# EAGLE board CarloopXL-v3.1 (EAGLE 7.5.0)
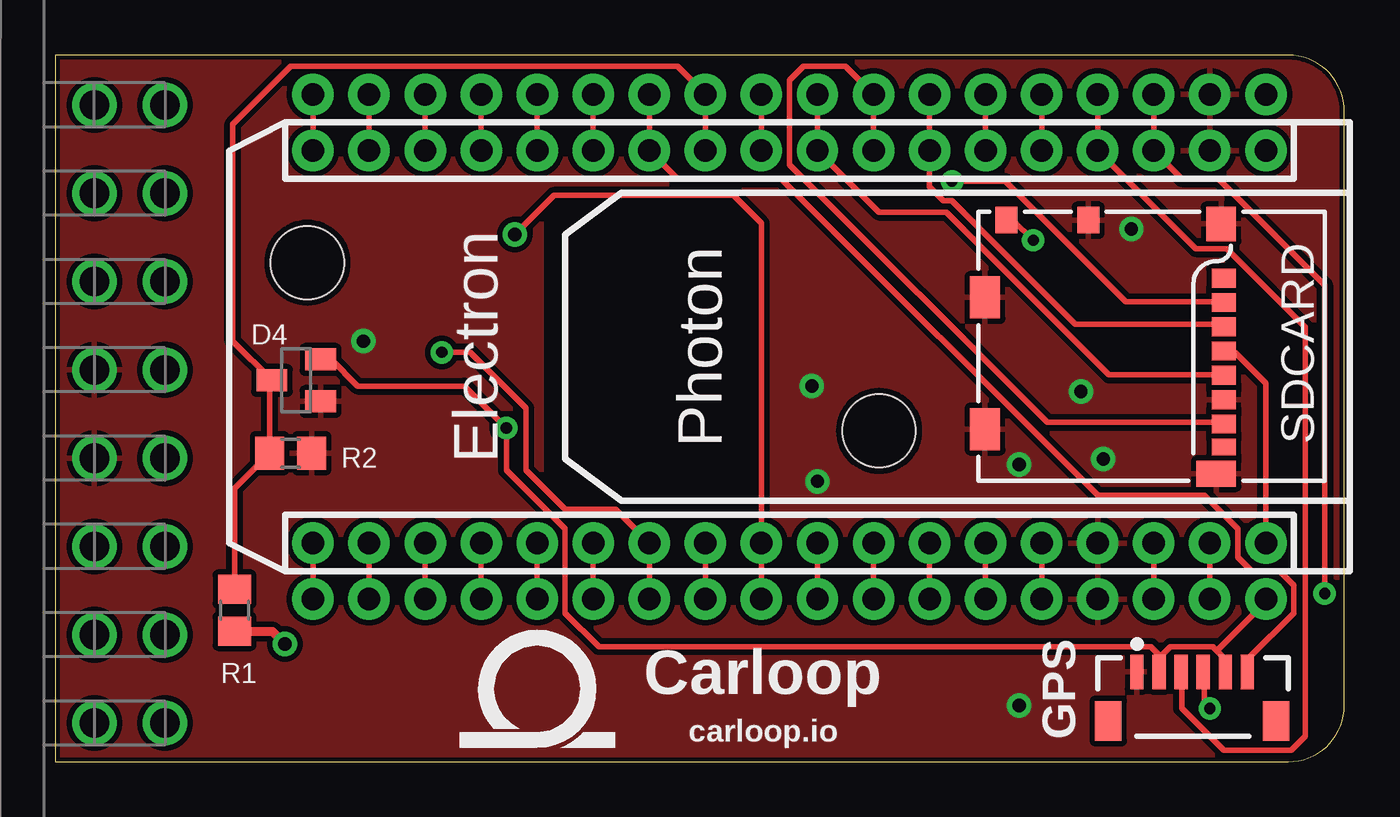
[diagram p0: board, top side]
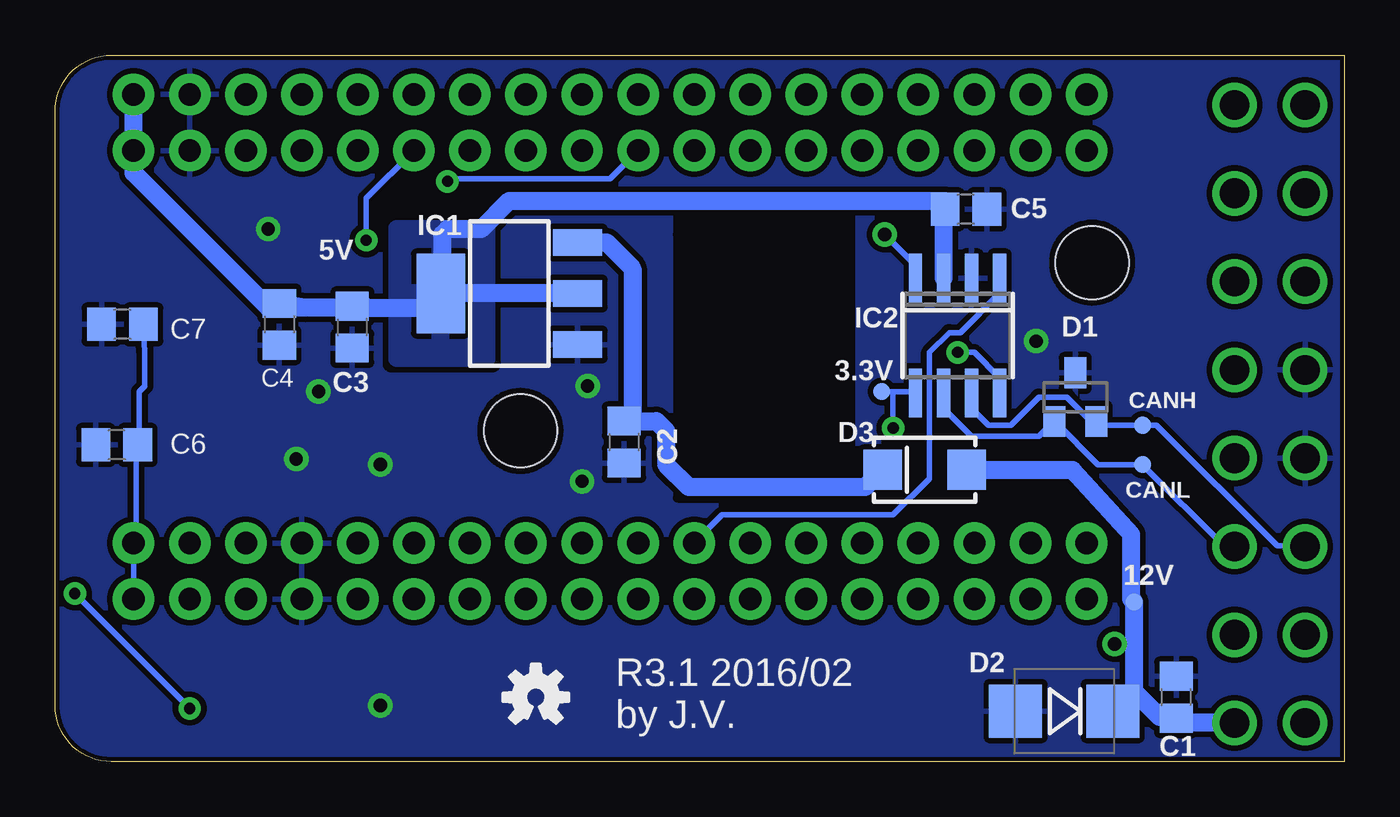
[diagram p1: board, bottom side, seen from below]

Size 58.42 x 32 mm. Coordinates in mm from the lower left corner, seen from the top.
Outline: 0,0 55.88,0 arc90 58.42,2.54 58.42,29.46 arc90 55.88,32 0,32 0,0
Copper layers (1*16): Top 0.035mm / dielectric 1.5mm / Bottom 0.035mm
Design rules "SparkFun *": minimum track width 8mil, minimum drill 20mil, track to track 10mil, track to pad 8mil, pad to pad 10mil, via to via 10mil, smd to smd 10mil, copper to edge 8mil, drill to drill 8mil, minimum pad ring 12mil, minimum via ring 10mil, stop-mask expansion 4mil, vias tented up to drill 45mil, thermal gap 10mil
Net classes: 0 default: width 0.254 mm; 1 power: width 0.813 mm, clearance 0.406 mm
tRestrict: area 22.4,11.9 to 30.2,25.7
bRestrict: area 22.4,11.9 to 30.2,25.7

## Footprints (pad centres in the part's own frame; a part is rotated, then mirrored left to right if it is on the bottom)
C0805 = smd 1.3 x 1.5: 1 -0.95,0; 2 0.95,0
SOT23 = smd 1 x 1.4: 1 -0.95,-1.1; 2 0.95,-1.1; 3 0,1.1
SMB-DIODE = smd 2.4 x 2.4: A 2.2,0; C -2.2,0
SMA-DIODE = smd 1.75 x 1.8: A -1.91,0; C 1.91,0
ELECTRON_EXTERNAL = drill 1.016 pad 1.88: 1 1.27,46.99; 2 1.27,44.45; 3 1.27,41.91; 4 1.27,39.37; 5 1.27,36.83; 6 1.27,34.29; 7 1.27,31.75; 8 1.27,29.21; 9 1.27,26.67; 10 1.27,24.13; 11 1.27,21.59; 12 1.27,19.05; 13 1.27,16.51; 14 1.27,13.97; 15 1.27,11.43; 16 1.27,8.89; 17 1.27,6.35; 18 1.27,3.81; 19 19.05,3.81; 20 19.05,6.35; 21 19.05,8.89; 22 19.05,11.43; 23 19.05,13.97; 24 19.05,16.51; 25 19.05,19.05; 26 19.05,21.59; 27 19.05,24.13; 28 19.05,26.67; 29 19.05,29.21; 30 19.05,31.75; 31 19.05,34.29; 32 19.05,36.83; 33 19.05,39.37; 34 19.05,41.91; 35 19.05,44.45; 36 19.05,46.99; @1 -1.27,46.99; @2 -1.27,44.45; @3 -1.27,41.91; @4 -1.27,39.37; @5 -1.27,36.83; @6 -1.27,34.29; @7 -1.27,31.75; @8 -1.27,29.21; @9 -1.27,26.67; @10 -1.27,24.13; @11 -1.27,21.59; @12 -1.27,19.05; @13 -1.27,16.51; @14 -1.27,13.97; @15 -1.27,11.43; @16 -1.27,8.89; @17 -1.27,6.35; @18 -1.27,3.81; @19 21.59,3.81; @20 21.59,6.35; @21 21.59,8.89; @22 21.59,11.43; @23 21.59,13.97; @24 21.59,16.51; @25 21.59,19.05; @26 21.59,21.59; @27 21.59,24.13; @28 21.59,26.67; @29 21.59,29.21; @30 21.59,31.75; @31 21.59,34.29; @32 21.59,36.83; @33 21.59,39.37; @34 21.59,41.91; @35 21.59,44.45; @36 21.59,46.99
JST-6-SMD-VERT-1.0MM = smd 0.6 x 1.55: 1 -2.54,1.27; 2 -1.54,1.27; 3 -0.54,1.27; 4 0.46,1.27; 5 1.46,1.27; 6 2.46,1.27 | smd 1.2 x 1.8: P$1 -3.84,-0.955; P$2 3.76,-0.955
SOT223 = smd 1.219 x 2.235: 1 -2.311,-3.099; 2 0,-3.099; 3 2.311,-3.099 | smd 3.6 x 2.2: 4 0,3.099
SO8 = smd 0.6 x 2.2: 1 -1.905,-2.6; 2 -0.635,-2.6; 3 0.635,-2.6; 4 1.905,-2.6; 5 1.905,2.6; 6 0.635,2.6; 7 -0.635,2.6; 8 -1.905,2.6
OBDII-COMTECH = drill 1.346: 1 -14,0; 2 -10,0; 3 -6,0; 4 -2,0; 5 2,0; 6 6,0; 7 10,0; 8 14,0; 9 -14,3.2; 10 -10,3.2; 11 -6,3.2; 12 -2,3.2; 13 2,3.2; 14 6,3.2; 15 10,3.2; 16 14,3.2
R0805 = smd 1.3 x 1.5: 1 -0.95,0; 2 0.95,0
MICRO-SD-MOLEX-CORRECT = smd 0.85 x 1.1: 1 3.105,0.25; 2 2.005,0.25; 3 0.905,0.25; 4 -0.195,0.25; 5 -1.295,0.25; 6 -2.395,0.25; 7 -3.495,0.25 | smd 0.75 x 1.1: 8 -4.545,0.25 | smd 1.2 x 1: CD1 5.74,6.4; CD2 5.74,10.1 | smd 1.55 x 1.35: G1 5.565,0.375 | smd 1.17 x 1.8: G2 -5.755,0.6 | smd 1.9 x 1.35: G3 -3.735,11.075; G4 2.235,11.075
STAND-OFF = hole 3.302: 0,0
PAD.03X.03 = smd 0.762 x 0.762: P$1 0,0

## Placement (x,y rotation side)
C1  .47u  [C0805]  7.62,2.92 90 bottom
C2  10u  [C0805]  32.64,14.48 270 bottom
C3  22u  [C0805]  44.96,19.68 270 bottom
C4  DNP  [C0805]  48.26,19.81 270 bottom
C5  0.1u  [C0805]  17.14,25.02 180 bottom
C6  0.1u  [C0805]  55.63,14.35 180 bottom
C7  1u  [C0805]  55.37,19.81 180 bottom
D1  PESD1CAN  [SOT23]  12.19,16.51 0 bottom
D2  1SMB16CAT3G  [SMB-DIODE]  12.7,2.29 180 bottom
D3  RS1J  [SMA-DIODE]  19.02,13.23 180 bottom
D4  BAT54S  [SOT23]  10.92,17.27 90 top
ELECTRON  ELECTRON_WITH_EXTERNAL_HEADERS  [ELECTRON_EXTERNAL]  7.87,28.96 270 top
F2  [OSHW-LOGO-S]  36.64,2.92 0 bottom
GPS  JST  [JST-6-SMD-VERT-1.0MM]  51.56,2.79 0 top
IC1  NCP1117CORRECT  [SOT223]  37.85,21.21 90 bottom
IC2  TJA1049  [SO8]  17.53,19.3 180 bottom
J1  OBDII  [OBDII-COMTECH]  1.78,15.75 270 top
R1  62k  [R0805]  8.13,6.86 270 top
R2  10k  [R0805]  10.67,13.97 180 top
SDCARD  USD-SOCKETMOLEX-CORRECT  [MICRO-SD-MOLEX-CORRECT]  53.21,18.8 90 top
STANDOFF1  STAND-OFF  [STAND-OFF]  11.43,22.61 0 top
STANDOFF2  STAND-OFF  [STAND-OFF]  37.34,14.99 0 top
TP1  CANH  [PAD.03X.03]  9.14,15.24 0 bottom
TP2  CANL  [PAD.03X.03]  9.14,13.46 0 bottom
TP3  12V  [PAD.03X.03]  9.53,7.24 0 bottom
TP5  3.3V  [PAD.03X.03]  20.95,16.76 0 bottom
U$1  LOGO  [CARLOOP]  18.03,0.76 0 top
ZDRAW1  [A4L-LOC]  64.71,30.72 0 top  (outside the outline)

## Library data of the parts
C1 = rcl; PARTNO: C0805C474K5RACTU
C2 = rcl; PARTNO: GRM21BR6YA106KE43L
C3 C4 = rcl; PARTNO: GRM219R61A226MEA0D
C5 C6 = rcl; PARTNO: 08055C104KAT2A
C7 = rcl; PARTNO: CC0805KKX7R7BB105
D1 = MuniRent; PARTNO: PESD1CAN-215
D2 = BUG; PARTNO: 1SMB16CAT3G; ROLE: Overvoltage protection
D3 = BUG; PARTNO: RS1J-E3/5AT; ROLE: Reverse protection
D4 = MuniRent; PARTNO: BAT54S-7-F
ELECTRON = MuniRent; PARTNO: PPTC181LFBN-RC
F2 = SparkFun-Aesthetics
GPS = MuniRent; PARTNO: BM06B-SRSS-TB; PROD_ID: CONN-08249
IC1 = MuniRent; PARTNO: NCP1117LPST50T3G
IC2 = MuniRent; PARTNO: TJA1049T-118
J1 = MuniRent; PARTNO: OBD-II
R1 = rcl; PARTNO: ERJ-6ENF6202V
R2 = rcl; PARTNO: ERJ-6ENF1002V
SDCARD = MuniRent; PARTNO: 1040310811
STANDOFF1 STANDOFF2 = SparkFun-Electromechanical; BOM: EXCLUDE
TP1-TP3 TP5 = SparkFun-Passives; BOM: EXCLUDE
U$1 = MuniRent; BOM: EXCLUDE
ZDRAW1 = frames

## Nets
3.3V: C6.1 C7.1 D4.2 ELECTRON.36 ELECTRON.@36 GPS.2 GPS.5 IC2.5 SDCARD.4 TP5.P$1
5V [power]: C3.1 C4.1 C5.2 ELECTRON.1 ELECTRON.@1 IC1.2 IC1.4 IC2.3
+12V [power]: C1.1 D2.C D3.A J1.16 R1.2 TP3.P$1
CANA_EN: ELECTRON.25 ELECTRON.@25 IC2.8
CANA_RX: ELECTRON.27 ELECTRON.@27 IC2.4
CANA_TX: ELECTRON.26 ELECTRON.@26 IC2.1
GND: C1.2 C2.2 C3.2 C4.2 C5.1 C6.2 C7.2 D1.3 D2.A D4.1 ELECTRON.2 ELECTRON.33 ELECTRON.@2 ELECTRON.@33 GPS.1 IC1.1 IC2.2 J1.4 J1.5 R2.1 SDCARD.6 SDCARD.CD1 SDCARD.G1 SDCARD.G2 SDCARD.G3 SDCARD.G4
GPS_EN: ELECTRON.12 ELECTRON.@12 GPS.6
GPS_RX: ELECTRON.3 ELECTRON.@3 GPS.4
GPS_TX: ELECTRON.4 ELECTRON.@4 GPS.3
HSPD_HI: D1.2 IC2.7 J1.6 TP1.P$1
HSPD_LO: D1.1 IC2.6 J1.14 TP2.P$1
N$1: ELECTRON.13 ELECTRON.@13
N$7: ELECTRON.14 ELECTRON.@14
N$10: ELECTRON.35 ELECTRON.@35
N$11: ELECTRON.34 ELECTRON.@34
N$12: ELECTRON.32 ELECTRON.@32
N$13: ELECTRON.31 ELECTRON.@31
N$14: ELECTRON.30 ELECTRON.@30
N$15: ELECTRON.29 ELECTRON.@29
N$16: ELECTRON.28 ELECTRON.@28
N$17: ELECTRON.15 ELECTRON.@15
N$19: ELECTRON.16 ELECTRON.@16
N$20: ELECTRON.17 ELECTRON.@17
N$21: ELECTRON.18 ELECTRON.@18
N$22: ELECTRON.19 ELECTRON.@19
N$23: ELECTRON.20 ELECTRON.@20
N$24: ELECTRON.21 ELECTRON.@21
N$26: ELECTRON.5 ELECTRON.@5
N$27: ELECTRON.23 ELECTRON.@23
N$28: ELECTRON.24 ELECTRON.@24
N$29: ELECTRON.22 ELECTRON.@22
N$31 [power]: C2.1 D3.C IC1.3
SD_CS: ELECTRON.10 ELECTRON.@10 SDCARD.2
SD_DETECT: ELECTRON.6 ELECTRON.@6 SDCARD.CD2
SPI_MISO: ELECTRON.8 ELECTRON.@8 SDCARD.7
SPI_MOSI: ELECTRON.7 ELECTRON.@7 SDCARD.3
SPI_SCK: ELECTRON.9 ELECTRON.@9 SDCARD.5
VBAT: D4.3 ELECTRON.11 ELECTRON.@11 R1.1 R2.2

## Tracks (layer width: path | path; a pad name or v marks a point on that pad's centre or on a via)
3.3V  (via drill 0.51)
  Top 0.254: 52.64,5.02 52.96,4.7 52.96,4.06 GPS.5 | 52.64,5.02 52.45,5.21 50.55,5.21 50.04,4.7 50.04,4.06 GPS.2 50.04,4.83 49.66,5.21 24.64,5.21 23.11,6.73 23.11,10.54 20.45,13.21 v20.45,15.11 18.54,17.02 13.72,17.02 12.51,18.22 | ELECTRON.36 54.86,17.14 53.47,18.54 53.09,18.54 SDCARD.4 | 52.64,5.02 54.86,7.24 ELECTRON.@36
  Top 0.406: D4.2 12.51,18.22
  Bottom 0.254: C7.1 54.36,18.54 54.36,17.02 54.61,16.76 54.61,13.72 C6.1 54.74,13.72 54.74,9.91 ELECTRON.36 ELECTRON.@36 | 20.45,16.76 19.43,16.76 IC2.5 | 20.45,16.76 TP5.P$1 | v20.45,15.11 20.45,16.76
5V
  Bottom 0.813: 46.99,20.57 47.72,20.57 48.75,20.56 54.86,26.67 ELECTRON.1 ELECTRON.@1 | 44.32,20.57 46.99,20.57 | IC2.3 18.16,24.95 C5.2 18.09,25.4 37.85,25.4 39.12,24.13 40.64,24.13 40.89,23.88 40.89,21.26 IC1.4 | C4.1 46.99,20.57 | IC1.2 IC1.4 | 40.77,20.57 40.77,21.03 IC1.4 | C3.1 44.38,20.64 44.32,20.57 | 44.32,20.57 41.66,20.57 41.53,20.45 41.4,20.57 IC1.4
  pour Bottom: 38.86,24.13 42.93,24.13 42.93,18.29 38.86,18.29
+12V  (via drill 0.6)
  Top 0.406: R1.2 9.84,5.91 v10.41,5.33
  Bottom 0.406: v10.41,5.33 9.65,5.33 TP3.P$1
  Bottom 0.813: 9.53,3.17 TP3.P$1 9.65,7.37 9.65,10.29 12.32,13.21 17.09,13.21 D3.A | 9.53,3.17 10.41,2.29 D2.C | 9.53,3.17 8.38,2.03 7.62,2.03 C1.1 7.24,1.78 5.08,1.78 J1.16
CANA_EN  (via drill 0.51)
  Top 0.254: v17.53,18.54 18.8,18.54 21.34,16 21.34,13.21 23.11,11.43 25.4,11.43 ELECTRON.25 ELECTRON.@25
  Bottom 0.254: IC2.8 15.62,17.4 16.76,18.54 v17.53,18.54
CANA_RX  (via drill 0.6)
  Top 0.254: ELECTRON.@27 ELECTRON.27 32,24.38 30.73,25.65 22.61,25.65 v20.83,23.88
  Bottom 0.254: v20.83,23.88 19.43,22.48 IC2.4
CANA_TX
  Top 0.254: ELECTRON.26 ELECTRON.@26
  Bottom 0.254: IC2.1 15.62,21.21 17.4,19.43 17.91,19.43 18.8,18.54 18.8,12.83 20.45,11.18 28.19,11.18 ELECTRON.26
GND  (via drill 0.6)
  Top 0.254: 52.32,27.94 ELECTRON.2 | 47.24,7.62 ELECTRON.@33
  other vias: 46.48,16.76 34.54,12.7 13.97,19.05 43.69,2.54 34.29,17.02 47.5,13.72 43.69,13.46 48.77,24.13
  pour Top (rank 4): 0,0 55.88,0 arc90 58.42,2.54 58.42,29.46 arc90 55.88,32 0,32
  pour Bottom (rank 5): 0,0 55.88,0 arc90 58.42,2.54 58.42,29.46 arc90 55.88,32 0,32
GPS_EN
  Top 0.254: GPS.6 54.1,4.06 54.1,4.7 56.13,6.73 56.13,8 55.5,8.64 54.23,8.64 53.59,9.27 53.59,10.54 52.07,12.06 47.24,12.06 32.89,26.42 28.19,26.42 ELECTRON.12 ELECTRON.@12
GPS_RX  (via drill 0.51)
  Top 0.254: v52.32,2.41 52.07,2.67 52.07,4.06 GPS.4 | v57.53,7.62 57.53,21.59 52.7,26.42 51.05,26.42 ELECTRON.3 ELECTRON.@3
  Bottom 0.254: v57.53,7.62 v52.32,2.41
GPS_TX
  Top 0.254: GPS.3 51.05,4.06 51.05,2.41 52.96,0.51 56.01,0.51 56.64,1.14 56.64,19.68 53.09,23.24 51.69,23.24 ELECTRON.4 ELECTRON.@4
HSPD_HI
  Bottom 0.254: IC2.7 16.89,16 16.13,15.24 15.11,15.24 13.84,16.51 12.57,16.51 11.56,15.49 11.3,15.49 D1.2 11.18,15.37 11.05,15.24 TP1.P$1 8.51,15.24 3.05,9.78 1.78,9.78 J1.6
HSPD_LO
  Bottom 0.254: IC2.6 18.16,16 16.89,14.73 13.84,14.73 13.21,15.37 D1.1 13.08,15.37 11.18,13.46 TP2.P$1 5.46,9.78 5.08,9.78 J1.14
N$1
  Top 0.254: ELECTRON.@13 ELECTRON.13
N$7
  Top 0.254: ELECTRON.@14 ELECTRON.14
N$10
  Top 0.254: ELECTRON.35 ELECTRON.@35
N$11
  Top 0.254: ELECTRON.34 ELECTRON.@34
N$12
  Top 0.254: ELECTRON.32 ELECTRON.@32
N$13
  Top 0.254: ELECTRON.31 ELECTRON.@31
N$14
  Top 0.254: ELECTRON.30 ELECTRON.@30
N$15
  Top 0.254: ELECTRON.29 ELECTRON.@29
N$16
  Top 0.254: ELECTRON.28 ELECTRON.@28
N$17
  Top 0.254: ELECTRON.@15 ELECTRON.15
N$19
  Top 0.254: ELECTRON.@16 ELECTRON.16
N$20
  Top 0.254: ELECTRON.@17 ELECTRON.17
N$21
  Top 0.254: ELECTRON.@18 ELECTRON.18
N$22
  Top 0.254: ELECTRON.19 ELECTRON.@19
N$23
  Top 0.254: ELECTRON.20 ELECTRON.@20
N$24
  Top 0.254: ELECTRON.21 ELECTRON.@21
N$26
  Top 0.254: ELECTRON.@5 ELECTRON.5
N$27
  Top 0.254: ELECTRON.23 ELECTRON.@23
N$28
  Top 0.254: ELECTRON.24 ELECTRON.@24
N$29
  Top 0.254: ELECTRON.22 ELECTRON.@22
N$31
  Bottom 0.813: IC1.3 33.43,23.52 32.26,22.35 32.26,15.81 C2.1 31.18,15.43 30.73,14.99 30.73,13.46 29.72,12.45 21.71,12.45 D3.C
SD_CS  (via drill 0.51)
  Top 0.254: v40.64,26.29 43.05,26.29 48.51,20.83 52.96,20.83 SDCARD.2 | ELECTRON.10 ELECTRON.@10
  Bottom 0.254: v40.64,26.29 40.51,26.42 33.27,26.42 ELECTRON.10
SD_DETECT  (via drill 0.51)
  Top 0.254: ELECTRON.@6 ELECTRON.6 | v44.32,23.62 43.43,24.51 43.18,24.51 SDCARD.CD2
  Bottom 0.254: v44.32,23.62 44.32,25.53 ELECTRON.6
SPI_MISO
  Top 0.254: SDCARD.7 52.96,15.37 44.96,15.37 33.27,27.05 33.27,30.86 33.91,31.5 35.81,31.5 ELECTRON.@8 ELECTRON.8
SPI_MOSI
  Top 0.254: SDCARD.3 52.96,19.81 46.23,19.81 40.64,25.4 40.26,25.4 39.62,26.04 ELECTRON.7 ELECTRON.@7
SPI_SCK
  Top 0.254: SDCARD.5 52.96,17.53 47.75,17.53 40.39,24.89 37.34,24.89 ELECTRON.9 ELECTRON.@9
VBAT
  Top 0.254: ELECTRON.11 ELECTRON.@11 28.19,31.5 10.67,31.5 8.04,28.87 8.04,19.05 D4.3 9.72,17.17 R2.2 8.13,12.38 R1.1

## Text on the board
tPlace: Carloop | carloop.io
bPlace: 5V | 3.3V | CANH | CANL | 12V | R3.1 2016/02 / by J.V.
Document: NOTES: | Revision 3.0 | Julien Vanier | jvanier@gmail.com